# Altium PCB LED.PcbDoc
Units mil, origin at the board's own origin, x right, y up, seen from the top; angles counter-clockwise.
Board outline 3039.37 x 1452.76 mil, 2 copper layers (Top Layer, Bottom Layer); 30 components, 30 nets, 93 pads, 53 vias.
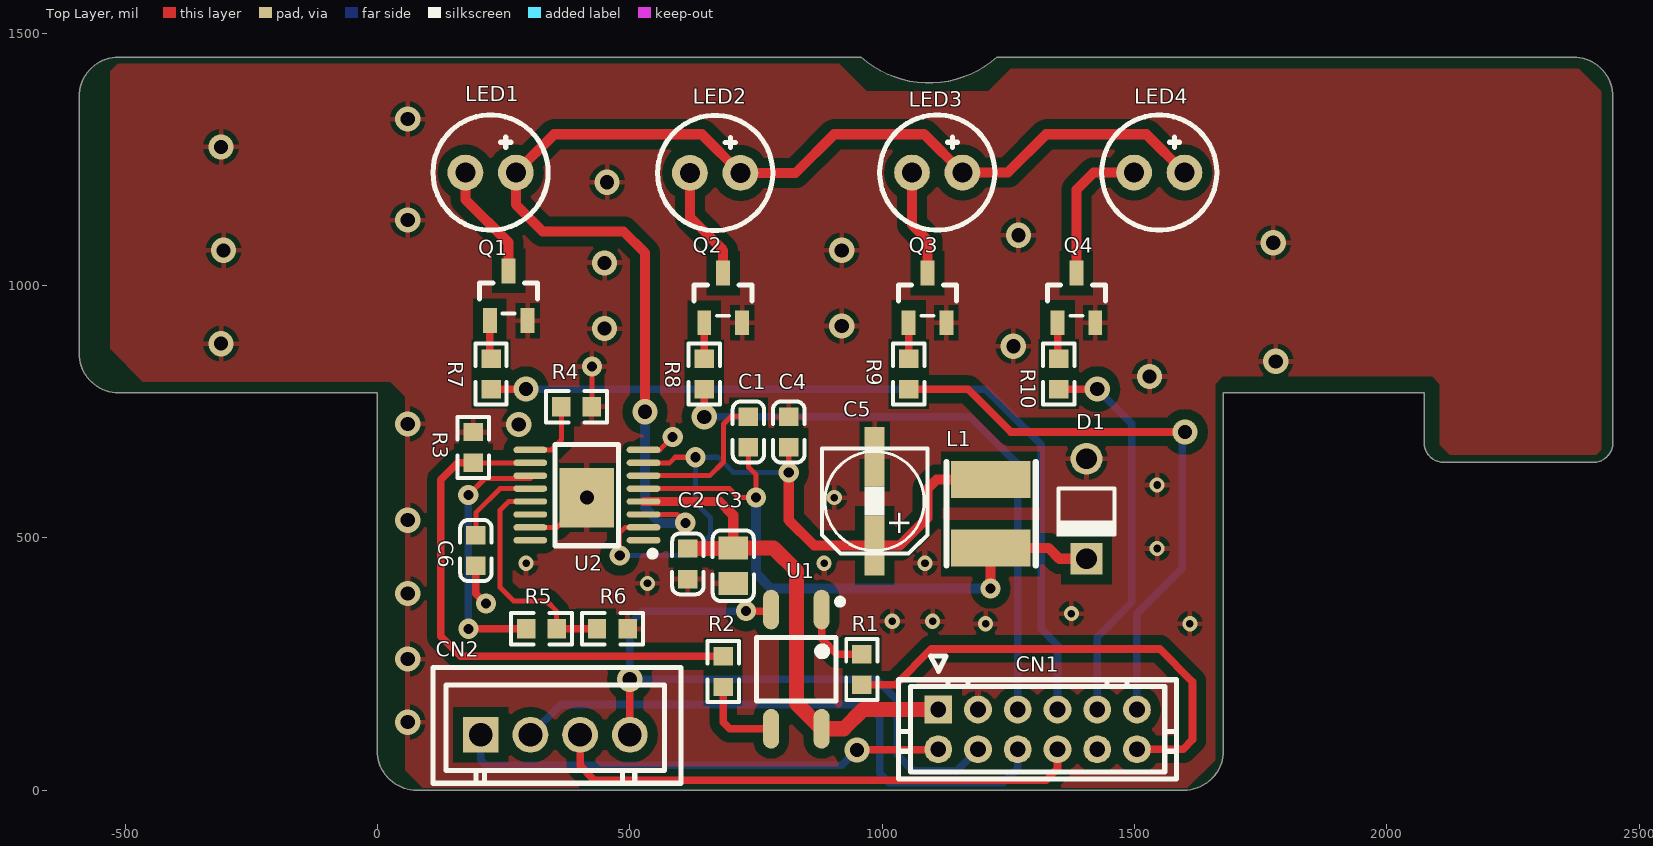
[diagram p0: Top Layer view]
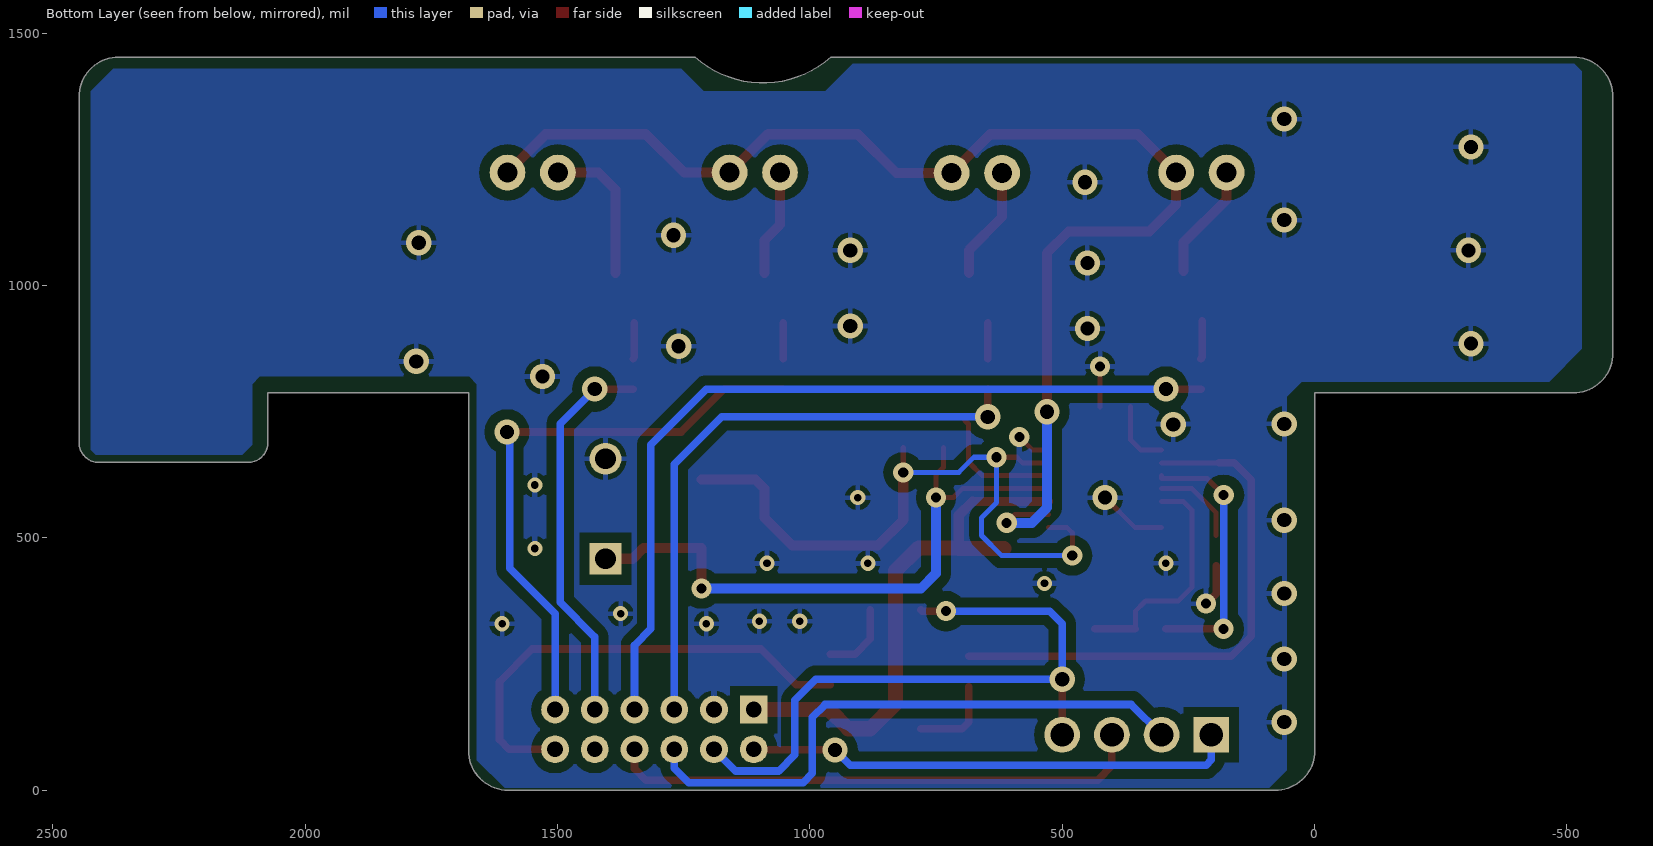
[diagram p1: Bottom Layer view, seen from below]

## Layer stack, top to bottom
Top Solder: solder mask 0.4, Solder Resist, Dk 3.5
Top Layer: signal copper 1.4
Dielectric 1: dielectric 12.6, FR-4, Dk 4.8
Bottom Layer: signal copper 1.4
Bottom Solder: solder mask 0.4, Solder Resist, Dk 3.5

## Board outline
-0.73,78.88 -0.73,787.54 -512.54,787.54 cw(c-512.54,866.28) -591.28,866.28 -591.28,1374.15 cw(c-512.54,1374.15) -512.54,1452.89 958.31,1452.89 ccw(c1092.98,1604.47) 1227.64,1452.89 2369.35,1452.89 cw(c2369.35,1374.15) 2448.09,1374.15 2448.09,689.12 cw(c2408.72,689.12) 2408.72,649.75 2113.45,649.75 cw(c2113.45,689.12) 2074.08,689.12 2074.08,787.54 1676.44,787.54 1676.44,78.88 cw(c1597.7,78.88) 1597.7,0.14 78.01,0.14 cw(c78.01,78.88)

## Design rules (kind name [scope] priority, off if disabled: settings)
Clearance [All] p1: gap=20 ignorepadtopadclearanceinfootprint=FALSE except(8: Arc-Arc Arc-Track Arc-SMDPad Arc-THPad Arc-Via Arc-Text Arc-Hole Track-Track Track-SMDPad Track-THPad Track-Via Track-Text Track-Hole SMDPad-SMDPad SMDPad-THPad SMDPad-Via SMDPad-Text SMDPad-Hole THPad-THPad THPad-Via THPad-Text THPad-Hole Via-Via Via-Text Via-Hole Text-Text Text-Hole)
HoleToHoleClearance [All] p1: gap=0 allowstackedmicrovias=TRUE
MinimumSolderMaskSliver [All] p1: minsoldermaskwidth=0
PolygonConnect [All] p1: connectstyle=Relief reliefconductorwidth=10 reliefentries=4 polygonreliefangle="90 Angle" airgapwidth=10
RoutingVias [All] p1: holewidth=20 width=40 viastyle="Through Hole" minholewidth=1 minwidth=1 maxholewidth=100 maxwidth=200
SilkToSilkClearance [All] p1: silktosilkclearance=0
SilkToSolderMaskClearance [IsPad] p1: minsilkscreentomaskgap=0 clearancetoexposedcopper=TRUE
SolderMaskExpansion [All] p1: expansion=4
Width [All] p1: maxlimit=100 minlimit=6 preferedwidth=10
26 further rules are at their usual default settings.

## Components (designator, comment, footprint, x,y, rotation, side; value= is the part's Value field where it differs from the comment)
C1 "0.1uF" 0603_C 735,710 r270 top
C2 "0.1uF" 0603_C 615,448.82 r270 top
C3 "10uF/50V" 0805_C 705,444.96 r270 top
C4 "2.2uF" 0603_C 815,710 r90 top
C5 "50V/10uF" SMD-EC-F5 985,485 r90 top
C6 "0.1uF" 0603_C 195,475 r270 top
CN1 "PHD-2x6A" PHD-2*6A 1283.7,111.3 r180 top
CN2 "XH-4A" XH-4P 344.6,169 r0 top
D1 "11DQ10" 11DQ10 1405,460 r0 top
L1 "CR43-3R3" CR43NP-3R3MC 1304.43,445.58 r90 top
LED1 "333-2SURD/S530-A3" 5mmLED 225,1225 r0 top locked
LED2 "333-2SURD/S530-A3" 5mmLED 670,1224.17 r0 top locked
LED3 "333-2SURD/S530-A3" 5mmLED 1110,1225 r0 top locked
LED4 "333-2SURD/S530-A3" 5mmLED 1550,1225 r0 top locked
Q1 "IRLML0030TRPBF" SOT-23(SOT-23-3) 260,980 r270 top
Q2 "IRLML0030TRPBF" SOT-23(SOT-23-3) 685,975.79 r270 top
Q3 "IRLML0030TRPBF" SOT-23(SOT-23-3) 1090,975.79 r270 top
Q4 "IRLML0030TRPBF" SOT-23(SOT-23-3) 1385,975.79 r270 top
R1 "330Ω" 0603_R 960,239.68 r90 top
R2 "10K" 0603_R 685,235 r270 top
R3 "20K" 0603_R 190,679.69 r270 top
R4 "10K" 0603_R 394.69,760 r180 top
R5 "3.3K ±0.1%" 0603_R 324.69,320 r180 top
R6 "1.5K ±0.1%" 0603_R 465.32,320 r180 top
R7 "1KΩ ±1%" 0603_R 225,825 r90 top
R8 "1KΩ ±1%" 0603_R 647.6,825 r90 top
R9 "1KΩ ±1%" 0603_R 1052.6,825 r90 top
R10 "1KΩ ±1%" 0603_R 1350,825 r90 top
U1 "EL357N(B)(TA)-G" SOP-4_P2.54 830,240 r270 top
U2 "LT3474" LT3474 400,590 r90 top

## Footprints (in the part's own frame and the unit in brackets; to place one, negate y for a bottom-side part, rotate by r counter-clockwise, add the part's x,y. Pads: shape width x height; smd on the part's side, far side on the other; paste and mask are expansions set on the pad)
5mmLED [mm]
  round 1.8 hole 1: 1(-1.291,-0.021) 2(1.249,-0.021)
  silkscreen extent -2.92,-2.92 2.88,2.88
11DQ10 [mm]
  round 1.6 hole 1.05: 1(0,5)
  rect 1.6x1.6 hole 1.05: 2(0,-0.03)
  silkscreen extent -1.5,1.1 1.4,3.5
0603_C [mm]
  rect 0.93x0.98 smd: 1(-0.77,0) 2(0.77,0)
  silkscreen extent -1.53,-0.79 1.54,0.79, body extent -0.8,-0.4 0.8,0.4, height 0.3
0603_R [mm]
  rect 0.93x0.98 smd: 1(-0.77,0) 2(0.77,0)
  silkscreen extent -1.53,-0.79 1.54,0.79, body extent -0.85,-0.4 0.85,0.4, height 0.56
0805_C [mm]
  rect 1.16x1.47 smd: 1(-0.89,0) 2(0.89,0)
  silkscreen extent -1.77,-1.04 1.77,1.04, body extent -1,-0.62 1,0.63, height 0.77
CR43NP-3R3MC [mm]
  rect 1.85x4 smd: 1(0.874,2.271) 2(4.326,2.271)
  silkscreen extent 0,0 5.2,4.5
LT3474 [mm]
  oval 0.32x1.7 smd: 1(-2.402,-3.231) 2(-1.752,-3.231) 3(-1.102,-3.231) 4(-0.452,-3.231) 5(0.198,-3.231) 6(0.848,-3.231) 7(1.498,-3.231) 8(2.148,-3.231) 9(2.148,2.469) 10(1.498,2.469) 11(0.848,2.469) 12(0.198,2.469) 13(-0.452,2.469) 14(-1.102,2.469) 15(-1.752,2.469) 16(-2.402,2.469)
  rect 3x2.74 smd: 17(-0.254,-0.381)
  silkscreen extent -3.23,-3.83 2.42,1.22
PHD-2*6A [mm]
  rect 1.4x1.4 hole 0.8: 1(4.38,-1.237)
  round 1.4 hole 0.8: 2(2.38,-1.237) 3(0.38,-1.237) 4(-1.62,-1.237) 5(-3.62,-1.237) 6(-5.62,-1.237) 7(4.38,0.763) 8(2.38,0.763) 9(0.38,0.763) 10(-1.62,0.763) 11(-3.62,0.763) 12(-5.62,0.763)
  silkscreen extent -7.62,-3.94 6.38,2.26
SMD-EC-F5 [mm]
  rect 3x1 smd: 1(0,0) 2(4.477,0)
  silkscreen extent -0.41,-2.65 4.89,2.66
SOP-4_P2.54 [mm]
  oval 2x0.8 smd: 1(-3,1.27) 2(-3,-1.27) 3(3,-1.27) 4(3,1.27)
  silkscreen extent -3.55,-2 1.6,2.35
SOT-23(SOT-23-3) [mm]
  rect 1.25x0.7 smd: 1(1.25,-0.95) 2(1.25,0.95) 3(-1.25,0)
  silkscreen extent -0.65,-1.46 0.9,1.46, body extent -1.5,-1.5 1.5,1.5, height 1.3
XH-4P [mm]
  rect 1.8x1.8 hole 1.199: 1(-3.553,-1.499)
  round 1.8 hole 1.199: 2(-1.053,-1.499) 3(1.447,-1.499) 4(3.947,-1.499)
  silkscreen extent -5.97,-3.94 6.53,1.88

## Part data
C1 C2 C3 C4 C6: library part "0402 10nF (103) 10% 50V", "贴片电容", Package=0402, SuppliersPartNumber=C15195, ComponentLink1Description=供应, ComponentLink1URL=http://www.szlcsc.com/product/details_15869.html, Supplier=LC
C5: library part "100uF 16V", "电解电容", Package=SMD,6.3x5.4mm, SuppliersPartNumber=C128466, ComponentLink1Description=供应, ComponentLink1URL=https://item.szlcsc.com/139751.html, Supplier=LC
CN1: BOM_JLCPCB Part Class="Extended Part", BOM_Manufacturer=BOOMELE, BOM_Manufacturer Part="PHD-2*6P 2.0mmpitch", BOM_Supplier=LCSC, BOM_Supplier Part=C58103, spicePre=X, spiceSymbolName=PHD-2x6A
CN2: BOM_JLCPCB Part Class="Extended Part", BOM_Manufacturer=BOOMELE, BOM_Manufacturer Part=XH-4A, BOM_Supplier=LCSC, BOM_Supplier Part=C37815, spicePre=C, spiceSymbolName=XH-4A
D1: library part DIODE_1
L1: library part "10uH ±20% 5.4A", "贴片磁珠", Package=12575, SuppliersPartNumber=C91662, ComponentLink1Description=供应, ComponentLink1URL=https://item.szlcsc.com/92851.html, Supplier=LC
LED1 LED2 LED3 LED4: BOM_JLCPCB Part Class="Extended Part", BOM_Manufacturer=EVERLIGHT, BOM_Manufacturer Part=333-2SURD/S530-A3, BOM_Supplier=LCSC, BOM_Supplier Part=C87271, spicePre=L, spiceSymbolName=333-2SURD/S530-A3
Q1 Q2 Q3 Q4: library part IRF3205, "HEXFET Power MOSFET", ComponentLink1Description="Manufacturer Link", ComponentLink1URL=http://www.irf.com/, ComponentLink2Description=Datasheet, ComponentLink2URL=http://www.irf.com/product-info/datasheets/data/irf3205.pdf, DatasheetVersion=Aug-1997, LatestRevisionDate=17-Jul-2002, LatestRevisionNote="Re-released for DXP Platform.", Note="Pin 2 is electrically connected to pin 4.", PackageDescription="TO, Thru-Hole, Vertical, Heatsink Mounted; 3 In-Line Leads; Pitch 2.54 mm", PackageReference=TO-220AB, PackageVersion=Feb-1997, Published=8-Jun-2000, Publisher="Altium Limited"
R1 R2 R3 R4 R5 R6 R7 R8 R9 R10: library part "0603 4.7Ω (4R70) 1%", "贴片电阻", Package=0603, SuppliersPartNumber=C23164, ComponentLink1Description=供应, ComponentLink1URL=http://www.szlcsc.com/product/details_23891.html, Supplier=LC
U1: library part EL357N(B)(TA)-G_[C6649], "贴片光耦", Package=SOP-4_P2.54, SuppliersPartNumber=C6649, ComponentLink1Description=供应, ComponentLink1URL=http://www.szlcsc.com/product/details_7114.html, Supplier=LC
U2: library part LE3474

## Via types
v1: diameter 50, hole 28, Top Layer to Bottom Layer, 29 vias
v2: diameter 30, hole 15, Top Layer to Bottom Layer, 12 vias
v3: diameter 40, hole 20, Top Layer to Bottom Layer, 12 vias

## Nets (pads, with @x,y where several pads share a name; then routed paths per layer and width w, separated by ;. In a path a pad name is that pad's centre, name@x,y a point inside that pad or via, vN(x,y) a via of type N, cw(c..) or ccw(c..) an arc to the next point about the centre after c; other vN are vias at no path point)
5V_HC_Test: CN1.9 CN2.2 | length 1169.1
  Bottom Layer w15: CN2.2 363.14,170 970,170 995,145 995,33.74 1013.54,15.2 1240.2,15.2 1268.74,43.74 CN1.9
5V_LED_Con1: CN1.4 R7.1 | length 1674.1
  Top Layer w15: R7.1 294.06,794.69 v1(294.37,795)
  Bottom Layer w15: v1(294.37,795) 1205,795 1315,685 1315,320 1347.48,287.52 CN1.4
5V_LED_Con2: CN1.3 R8.1 | length 1200.9
  Top Layer w15: v1(647.6,740) R8.1
  Bottom Layer w15: v1(647.6,740) 1175,740 1268.74,646.26 CN1.3
5V_LED_Con3: CN1.6 R9.1 | length 1171.8
  Top Layer w15: R9.1 1170.31,794.69 1255,710 v1(1600,710)
  Bottom Layer w15: CN1.6 1504.96,349.96 1595,440 1595,705 v1(1600,710)
5V_LED_Con4: CN1.5 R10.1 | length 768.2
  Top Layer w15: R10.1 v1@1426.22,794.69
  Bottom Layer w15: CN1.5 1426.22,303.75 1495,372.53 1495,726.22 v1(1426.22,795)
5V_Light_SHDN: R2.1 R3.2 U2.10 | length 1078.6
  Top Layer w10: R3.2 190.39,648.98 U2.10
  Top Layer w15: R3.2 159.37,649.37 125,615 125,305 164.69,265.31 R2.1
5V_Light_SHDN1: CN1.12 R1.1 | length 944
  Top Layer w15: R1.1 1026.97,209.37 1097.6,280 1550,280 1615,215 1615,100 1596.26,81.26 CN1.12
5V_MotorSen_1: CN1.10 CN2.3 | length 1067.4
  Top Layer w15: CN2.3 401.56,48.44 430,20 1325,20 1347.48,42.48 CN1.10
D+5V: CN1.7 CN2.1 | length 973.5
  Top Layer w15: v1(950,80) 1110,80 CN1.7
  Bottom Layer w15: CN2.1 204.7,60.3 215,50 920,50 v1(950,80)
DGND: CN1.8 CN2.4 U1.2 | length 1358.2
  Top Layer w15: CN2.4 v1(500,220) ; v3(730,355) 776.89,355 U1.2
  Bottom Layer w15: v3(730,355) 525.04,355 500,329.96 v1(500,220) 988.54,220 1030,178.54 1030,70.3 1062.1,38.2 1146.94,38.2 CN1.8
LED_Power: LED1.2 LED2.2 LED3.2 LED4.2 U2.3 | length 2560.1
  Top Layer w10: U2.3 593.39,546.61 v3(610,530)
  Top Layer w20: v1(530,750) 530,1065 487.5,1107.5 327.5,1107.5 274.17,1160.83 LED1.2 350,1300 642.51,1300 LED2.2 828.34,1223.34 905,1300 1083.34,1300 LED3.2 1249.17,1224.17 1325,1300 1523.34,1300 LED4.2
  Bottom Layer w20: v1(530,750) 530,560 560,530 v3(610,530)
NetC1_1: C1.1 U2.6 | length 300.3
  Top Layer w10: U2.6 658.39,623.39 685.6,650.6 685.6,725.91 700,740.31 C1.1
NetC1_2: C1.2 D1.2 L1.1 U2.5 | length 1242.3
  Top Layer w10: U2.5 697.78,597.8 715.57,580 v3(750,580) 750,625 735,640 C1.2
  Top Layer w20: v3(1215,400) L1.1 1330,480 1351.18,458.82 D1.2
  Bottom Layer w20: v3(750,580) 750,430 780,400 v3(1215,400)
NetC4_1: C4.1 C5.1 L1.2 U2.2 U2.7 | length 1419
  Top Layer w10: v3(480,465) 480,510.31 490.71,521.02 U2.2 ; U2.7 578.98,648.98 590,660 v3(630,660) ; v3(815,630) C4.1
  Top Layer w20: v3(815,630) 815,535.31 865.31,485 C5.1 1035,485 1090,540 1090,597.8 1108.09,615.89 L1.2
  Bottom Layer w10: v3(480,465) 620,465 660,505 660,540 630,570 v3(630,660) 675,660 705,630 v3(815,630)
NetC6_1: C6.1 U2.12 | length 172.3
  Top Layer w10: C6.1 195,549.98 242.81,597.8 U2.12
NetLED1_1: LED1.1 Q1.3 | length 230.5
  Top Layer w20: LED1.1 174.17,1170.83 260,1085 Q1.3
NetLED2_1: LED2.1 Q2.3 | length 225.6
  Top Layer w20: LED2.1 619.17,1135.83 685,1070 Q2.3
NetLED3_1: LED3.1 Q3.3 | length 211.9
  Top Layer w20: LED3.1 1059.17,1120.83 1090,1090 Q3.3
NetLED4_1: LED4.1 Q4.3 | length 293.3
  Top Layer w20: Q4.3 1385,1190 1419.17,1224.17 LED4.1
NetQ1_1: Q1.1 R7.2 | length 76.5
  Top Layer w15: Q1.1 222.6,857.72 R7.2
NetQ2_1: Q2.1 R8.2 | length 71.3
  Top Layer w15: R8.2 Q2.1
NetQ3_1: Q3.1 R9.2 | length 71.3
  Top Layer w15: R9.2 Q3.1
NetQ4_1: Q4.1 R10.2 | length 72.3
  Top Layer w15: Q4.1 1347.6,857.72 R10.2
NetR1_2: R1.2 U1.1 | length 150.5
  Top Layer w15: U1.1 880,300 910,270 R1.2
NetR2_2: R2.2 U1.3 | length 170.1
  Top Layer w15: R2.2 685,135 698.11,121.89 U1.3
NetR4_2: R4.2 U2.9 | length 135.7
  Top Layer w10: U2.9 345,674.57 364.37,693.94 R4.2
P+12V: C2.1 C3.1 CN1.1 U1.4 U2.4 | length 1068.9
  Top Layer w18: U2.4 677.73,572.2
  Top Layer w20: 677.73,572.2 705,544.94 C3.1
  Top Layer w30: C2.1 704.13,479.13 C3.1 785,480 830,435 830,171.89 U1.4 924.01,121.89 962.12,160 CN1.1
PGND: C2.2 C3.2 C4.2 C5.2 C6.2 CN1.2 D1.1 Q1.2 Q2.2 Q3.2 Q4.2 R3.1 R4.1 R6.1 U2.8 U2.15 U2.17 | length 368.1
  Top Layer w10: U2.15 356.02,521.02 v1(415,580) ; R4.1 v3(425,840) ; U2.8 559.57,674.57 v3(585,700)
  Top Layer w15: C6.2 195,389.86 v3(215,369.86)
  other v1: 60,135 60,260 60,390 60,535.31 280,725 60,725.91 1530,820 1780,850 1260,880 -310,885 450,915 920,920 450,1045 -305,1070 920,1070 1775,1085 1270,1100 60,1130 455,1205 -310,1275 60,1330
  other v2: 1205,330 1610,330 1020,335 1100,335 1375,350 535,409.92 294.37,450 885,450 1085,450 1545,479.13 905,580 1545,605
REF: R5.2 U2.11 | length 516.4
  Top Layer w10: v3(180,585) 213.06,618.06 302.8,618.06 U2.11
  Top Layer w15: v3(180.2,320) R5.2
  Bottom Layer w15: v3(180.2,320) 179.5,320.7 179.5,579.11 v3@180.2,579.8
VADJ: R5.1 R6.2 U2.13 | length 466.7
  Top Layer w10: U2.13 260.02,572.2 242.81,555 242.81,402.19 270,375 335,375 355,355 R5.1
  Top Layer w15: R5.1 R6.2
pads on no net: CN1.11 U2.1 U2.14 U2.16

## Polygon pours and split planes (outlines as drawn)
PGND on Top Layer "Top Layer-PGND" (solid, pour order 0): -530,1425 -530,875 -465,810 25,810 55,780 55,40 90,5 1605,5 1660,60 1660,805 1675,820 2090,820 2105,805 2105,685 2125,665 2415,665 2425,675 2425,1385 2380,1430 1255,1430 1210,1385 970,1385 915,1440 -515,1440
PGND on Bottom Layer "Bottom Layer-PGND" (solid, pour order 2): -530,1425 -530,875 -465,810 25,810 55,780 55,40 90,5 1605,5 1660,60 1660,805 1675,820 2090,820 2105,805 2105,685 2125,665 2415,665 2425,675 2425,1385 2380,1430 1255,1430 1210,1385 970,1385 915,1440 -515,1440

## Silkscreen, mask and mechanical layers (free items; w line width, h text height)
Mechanical 1:
  circle w0.5: c93.76,984.39 r45.28
  circle w0.5: c1581.95,984.39 r45.28
  lines w0.5: -591.28,866.28 ccw(c-512.54,866.28) -512.54,787.54 -0.73,787.54 -0.73,78.88 ccw(c78.01,78.88) 78.01,0.14 1597.7,0.14 ccw(c1597.7,78.88) 1676.44,78.88 1676.44,787.54 2074.08,787.54 2074.08,689.12 ccw(c2113.45,689.12) 2113.45,649.75 2408.72,649.75 ccw(c2408.72,689.12) 2448.09,689.12 2448.09,1374.15 ccw(c2369.35,1374.15) 2369.35,1452.89 1227.64,1452.89 cw(c1092.98,1604.47) 958.31,1452.89 -512.54,1452.89 ccw(c-512.54,1374.15) -591.28,1374.15 -591.28,866.28
  text "。" at 11164.86,4902.96 h137.8

## Text inside footprints (layer, text, board x,y; h text height)
C5: Top Overlay "+" at 1054.95,502.51 h47.24 r90